# EAGLE board motorshield_jd (EAGLE 5.06)
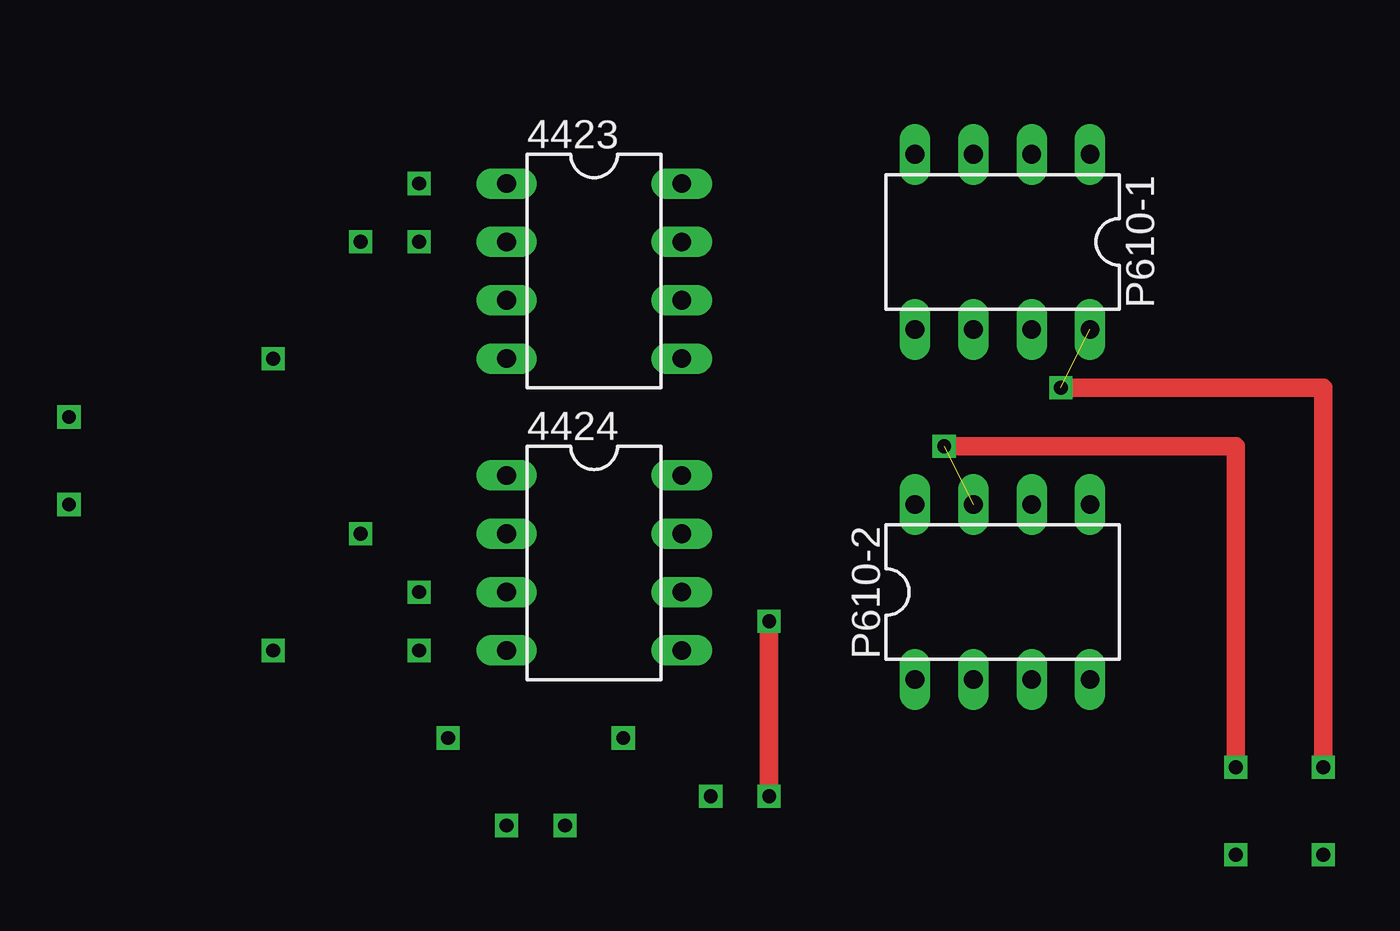
[diagram p0: board, top side]
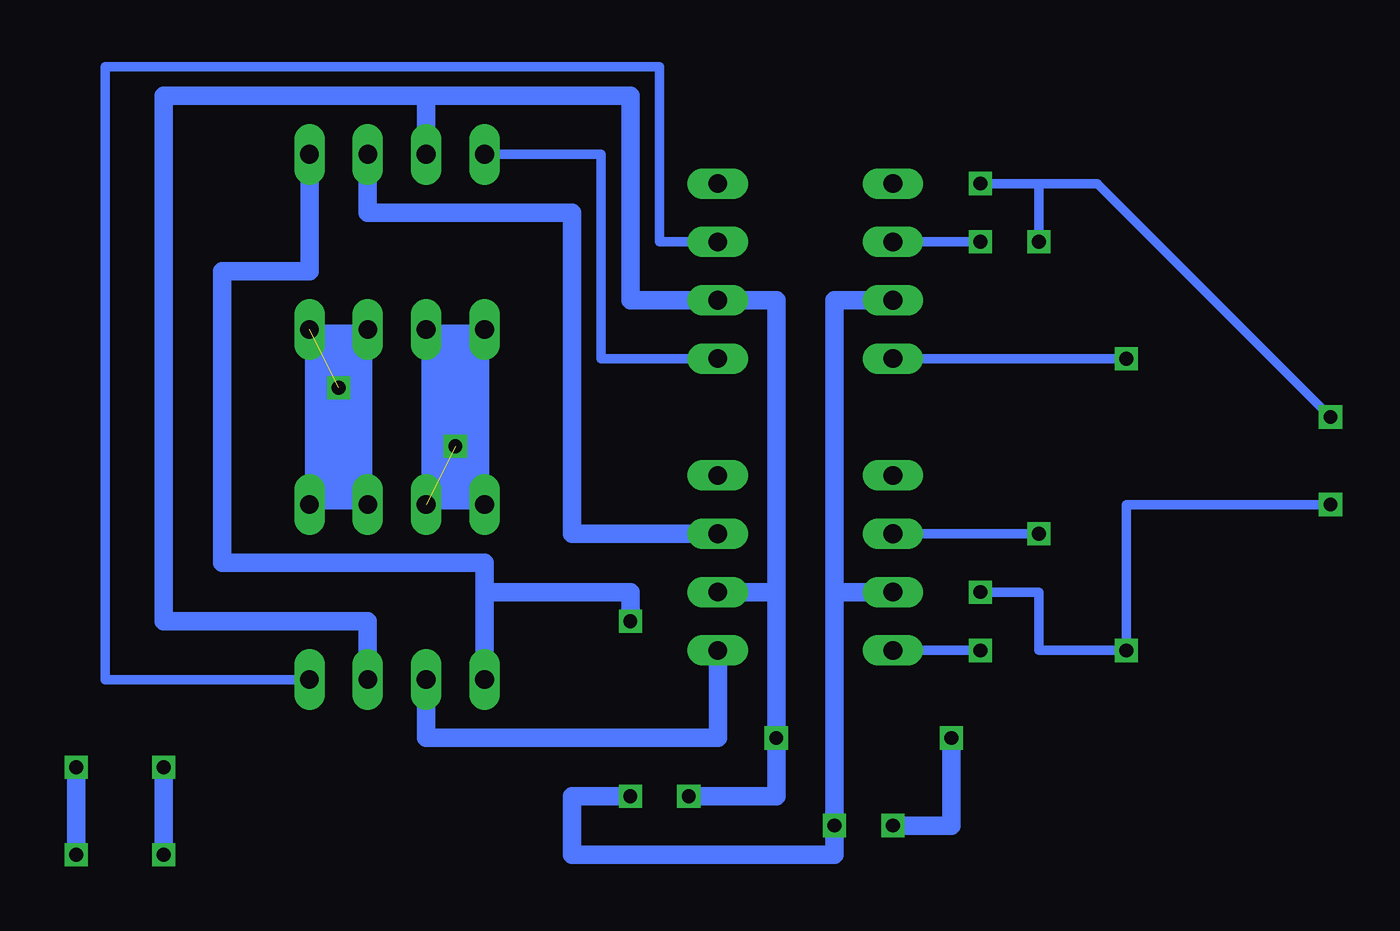
[diagram p1: board, bottom side, seen from below]

No outline drawn. Coordinates in mm, seen from the top.
Copper layers (1*16): Top 0.035mm / dielectric 1.5mm / Bottom 0.035mm
Design rules "default": minimum track width 10mil, minimum drill 24mil, track to track 8mil, track to pad 8mil, pad to pad 8mil, via to via 8mil, smd to smd 8mil, copper to edge 40mil, drill to drill 8mil, minimum pad ring 10mil, minimum via ring 8mil, stop-mask expansion 4mil, vias tented up to drill 0mil, thermal gap 10mil

## Footprints (pad centres in the part's own frame; a part is rotated, then mirrored left to right if it is on the bottom)
DIL08 = drill 0.813 long: 1 -3.81,-3.81; 2 -1.27,-3.81; 3 1.27,-3.81; 4 3.81,-3.81; 5 3.81,3.81; 6 1.27,3.81; 7 -1.27,3.81; 8 -3.81,3.81

## Placement (x,y rotation side)
4423  [DIL08]  21.59,55.88 270 top
4424  [DIL08]  21.59,43.18 270 top
P610-1  [DIL08]  39.37,57.15 180 top
P610-2  [DIL08]  39.37,41.91 0 top

## Library data of the parts
4423 4424 P610-1 P610-2 = ic-package

## Nets
+VDC: 4423.6 4424.6 P610-1.3 P610-2.3
GND: 4423.3 4424.3 P610-1.1 P610-2.1
MOTOR1: P610-1.5 P610-1.6 P610-2.7 P610-2.8
MOTOR2: P610-1.7 P610-1.8 P610-2.5 P610-2.6
N1: 4424.5 P610-2.2
N2: 4424.7 P610-1.2
P1: 4423.7 P610-2.4
P2: 4423.5 P610-1.4
S$1: 4423.2
S$4: 4423.4
S$5: 4424.2
S$6: 4424.4

## Tracks (layer width: path | path; a pad name or v marks a point on that pad's centre or on a via)
+VDC  (via drill 0.6)
  Bottom 0.406: 22.86,54.61 4423.6 29.21,54.61 | 22.86,41.91 v22.86,35.56 22.86,33.02
  Bottom 0.813: v26.67,33.02 22.86,33.02 22.86,41.91 | 22.86,41.91 22.86,54.61 29.21,54.61 29.21,63.5 38.1,63.5 | 4424.6 22.86,41.91 | 38.1,63.5 P610-1.3 | 38.1,63.5 49.53,63.5 49.53,40.64 40.64,40.64 P610-2.3
GND  (via drill 0.6)
  Top 0.406: v29.21,33.02 v29.21,40.64
  Top 0.813: v29.21,40.64 v29.21,33.02
  Bottom 0.406: 20.32,30.48 v20.32,31.75 20.32,41.91
  Bottom 0.813: 4423.3 20.32,54.61 20.32,41.91 | 20.32,41.91 20.32,30.48 31.75,30.48 31.75,33.02 v29.21,33.02 | v29.21,40.64 29.21,41.91 35.56,41.91 | 35.56,41.91 P610-2.1 | 35.56,41.91 35.56,43.18 46.99,43.18 46.99,55.88 43.18,55.88 P610-1.1 | 4424.3 20.32,41.91
MOTOR1  (via drill 0.6)  (1 unrouted)
  Top 0.813: v36.83,48.26 49.53,48.26 v49.53,34.29
  Bottom 0.406: P610-2.7 P610-1.6 | P610-1.6 P610-1.5 P610-2.8 P610-2.7 | P610-2.7 P610-1.6
  Bottom 0.813: v49.53,30.48 v49.53,34.29 | v36.83,48.26 36.83,52.07
MOTOR2  (via drill 0.6)  (1 unrouted)
  Top 0.813: v41.91,50.8 53.34,50.8 v53.34,34.29
  Bottom 0.406: P610-2.6 P610-1.7 | P610-2.5 P610-1.8 | P610-2.6 P610-2.5 | P610-2.5 P610-1.8 | P610-1.7 P610-1.8 | P610-2.6 P610-1.7
  Bottom 0.813: v53.34,30.48 v53.34,34.29 | 41.91,52.07 v41.91,50.8 41.91,49.53
N1
  Bottom 0.813: 4424.5 25.4,35.56 38.1,35.56 P610-2.2
N2
  Bottom 0.813: P610-1.2 40.64,58.42 31.75,58.42 31.75,44.45 4424.7
P1
  Bottom 0.406: P610-2.4 52.07,38.1 52.07,64.77 27.94,64.77 27.94,57.15 4423.7
P2
  Bottom 0.406: P610-1.4 30.48,60.96 30.48,52.07 4423.5
POWER-LED  (via drill 0.6)
  Bottom 0.813: v17.78,31.75 15.24,31.75 v15.24,35.56
S$1  (via drill 0.6)
  Bottom 0.406: v13.97,57.15 4423.2
S$4  (via drill 0.6)
  Bottom 0.406: 4423.4 v7.62,52.07
S$5  (via drill 0.6)
  Bottom 0.406: v11.43,44.45 4424.2
S$6  (via drill 0.6)
  Bottom 0.406: 4424.4 v13.97,39.37
SIGNAL2  (via drill 0.6)
  Bottom 0.406: v13.97,41.91 11.43,41.91 11.43,39.37 v7.62,39.37 7.62,45.72 v-1.27,45.72
SINGAL1  (via drill 0.6)
  Bottom 0.406: v11.43,57.15 11.43,59.69 v13.97,59.69 8.89,59.69 v-1.27,49.53
(copper drawn outside any net)
  shapes: Bottom area x2